# EAGLE board LN DRIVER (EAGLE 9.6.2)
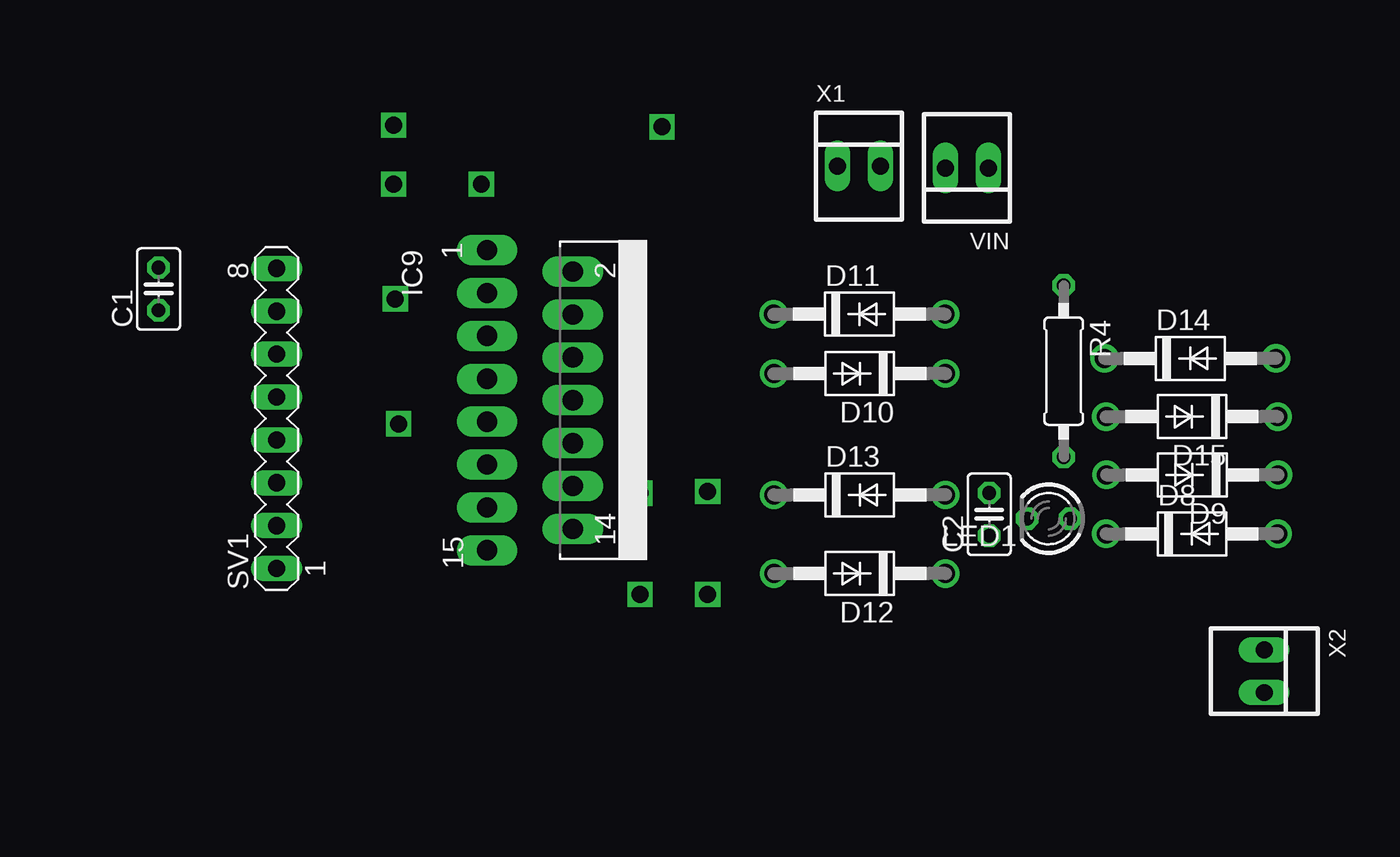
[diagram p0: board, top side]
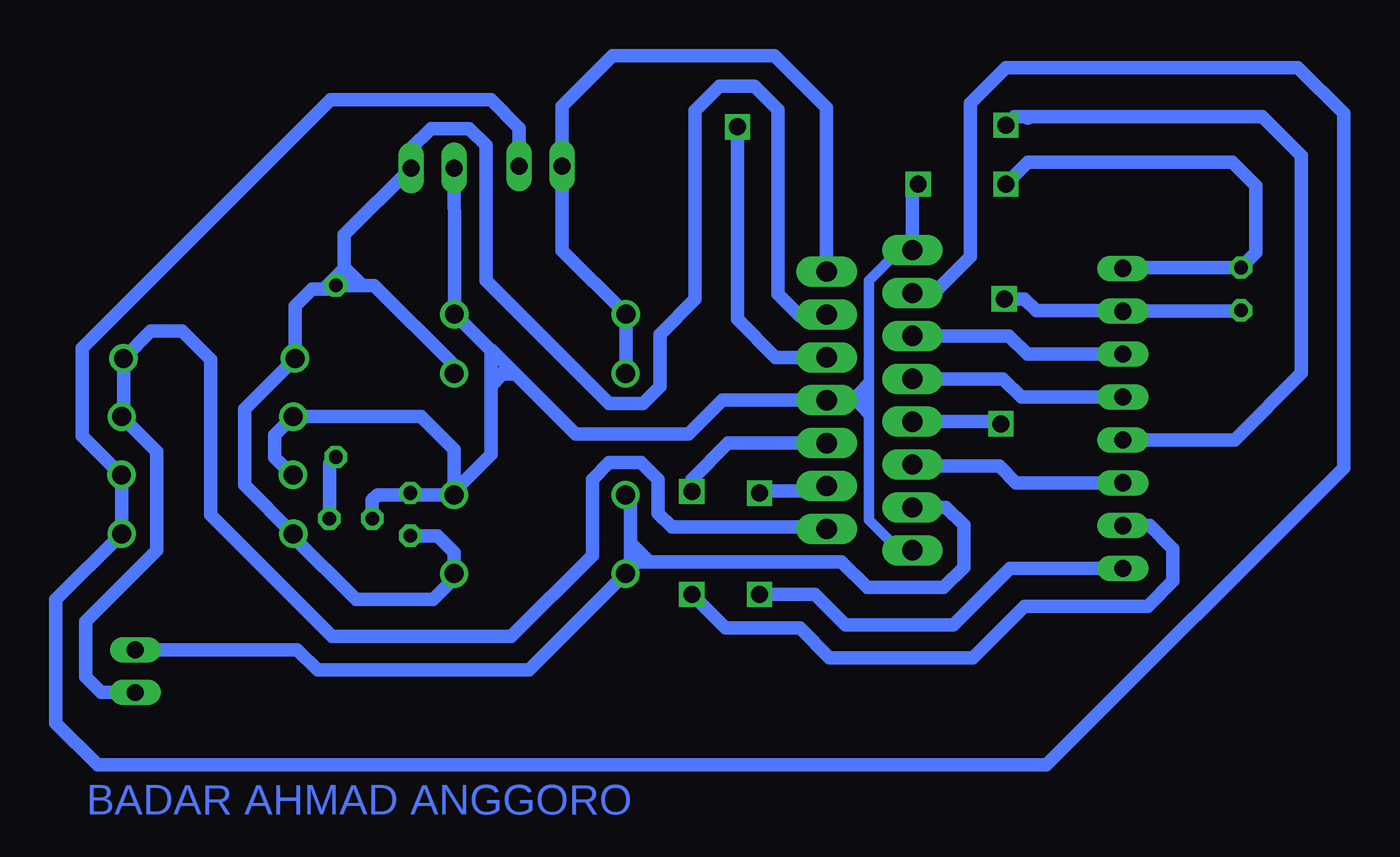
[diagram p1: board, bottom side, seen from below]

No outline drawn. Coordinates in mm, seen from the top.
Copper layers (1*16): Top 0.035mm / dielectric 1.5mm / Bottom 0.035mm
Design rules "default": minimum track width 6mil, minimum drill 0.35mm, track to track 6mil, track to pad 6mil, pad to pad 6mil, via to via 6mil, smd to smd 6mil, copper to edge 40mil, drill to drill 6mil, minimum pad ring 10mil, minimum via ring 8mil, stop-mask expansion 4mil, vias tented up to drill 0mil, thermal gap 10mil

## Footprints (pad centres in the part's own frame; a part is rotated, then mirrored left to right if it is on the bottom)
C025-025X050 = drill 0.813 octagon: 1 -1.27,0; 2 1.27,0
DO41-10 = drill 1.118: A 5.08,0; C -5.08,0
MULTIWATT-15 = drill 1.2 long: 1 -8.89,-7.62; 2 -7.62,-2.54; 3 -6.35,-7.62; 4 -5.08,-2.54; 5 -3.81,-7.62; 6 -2.54,-2.54; 7 -1.27,-7.62; 8 0,-2.54; 9 1.27,-7.62; 10 2.54,-2.54; 11 3.81,-7.62; 12 5.08,-2.54; 13 6.35,-7.62; 14 7.62,-2.54; 15 8.89,-7.62
LED3MM = drill 0.813 octagon: A -1.27,0; K 1.27,0
0207/10 = drill 0.813 octagon: 1 -5.08,0; 2 5.08,0
MA08-1 = drill 1.016 long: 1 -8.89,0; 2 -6.35,0; 3 -3.81,0; 4 -1.27,0; 5 1.27,0; 6 3.81,0; 7 6.35,0; 8 8.89,0
22-23-2021 = drill 1 long: 1 -1.27,0; 2 1.27,0

## Placement (x,y rotation side)
C1  100nF  [C025-025X050]  29.4,60.34 90 top
C2  100nF  [C025-025X050]  78.6,46.99 90 top
D8  1N4004  [DO41-10]  90.61,45.84 0 top
D9  1N4004  [DO41-10]  90.63,49.33 180 top
D10  1N4004  [DO41-10]  70.93,55.33 180 top
D11  1N4004  [DO41-10]  70.91,58.85 0 top
D12  1N4004  [DO41-10]  70.93,43.48 180 top
D13  1N4004  [DO41-10]  70.93,48.14 0 top
D14  1N4004  [DO41-10]  90.51,56.23 0 top
D15  1N4004  [DO41-10]  90.61,52.78 180 top
IC9  L298  [MULTIWATT-15]  56.48,53.75 270 top
LED1  [LED3MM]  82.12,46.74 180 top
R4  330  [0207/10]  83.01,55.47 270 top
SV1  [MA08-1]  36.39,52.67 90 top
VIN  22-23-2021  [22-23-2021]  77.28,67.51 180 top
X1  22-23-2021  [22-23-2021]  70.88,67.62 0 top
X2  22-23-2021  [22-23-2021]  94.89,37.7 270 top

## Library data of the parts
C1 C2 R4 = rcl
D8-D15 = diode
IC9 = st-microelectronics
LED1 = led
SV1 = con-lstb; OC_FARNELL: unknown; OC_NEWARK: unknown
VIN X1 X2 = con-molex; MF: MOLEX; MPN: 22-23-2021; OC_FARNELL: 1462926; OC_NEWARK: 25C3832

## Nets
GND: C2.2 D9.A D11.A D13.A D15.A IC9.1 IC9.8 IC9.15 LED1.K VIN.2
N$1: IC9.5 SV1.6
N$3: IC9.7 SV1.5
N$5: SV1.1
N$8: SV1.2
N$16: SV1.4
N$17: IC9.11 SV1.3
N$44: LED1.A R4.2
N$204: D8.A D9.C IC9.3 X1.2
N$205: D10.A D11.C IC9.2 X1.1
N$206: D12.A D13.C IC9.13 X2.1
N$207: D14.A D15.C IC9.14 X2.2
S$1: IC9.6
S$2: C1.2 SV1.8
S$3: IC9.9
S$4: IC9.10
S$5: IC9.12
VCC: C1.1 SV1.7
VDD: C2.1 D8.C D10.C D12.C D14.C IC9.4 R4.1 VIN.1

## Tracks (layer width: path | path; a pad name or v marks a point on that pad's centre or on a via)
GND  (via drill 1)
  Bottom 0.61: IC9.15 49.63,44.86 51.42,46.65 51.42,52.85 | 51.42,52.85 51.92,53.35 | 51.92,53.35 52.32,53.75 | IC9.1 49.63,62.64 51.42,60.85 51.42,54.85 | 51.42,54.85 51.42,54.15 | 51.42,54.15 51.42,53.85 | 51.42,53.85 51.42,52.85 | 51.42,54.85 52.12,54.15 | 52.12,54.15 52.42,53.85 51.42,53.85 | 52.32,53.75 52.02,53.75 52.12,53.65 | 52.32,53.75 IC9.8 | 51.42,54.15 52.12,54.15 | 51.92,53.35 51.42,53.85
  Bottom 0.813: LED1.K 80.85,47.84 80.55,48.14 D13.A | D13.A 76.01,50.84 77.95,52.78 D15.A 86.62,51.69 86.62,50.35 85.6,49.33 D9.A | VIN.2 75.99,62.61 D11.A 73.82,56.68 | 73.82,54.6 73.82,50.55 76.01,48.36 D13.A | 73.82,54.6 73.82,55.15 | 73.82,55.15 73.82,56.68 | 73.82,56.68 73.75,56.68 72.37,55.3 | 72.37,55.3 68.82,51.75 62.12,51.75 60.12,53.75 IC9.8 | 72.37,55.3 73.12,55.3 | 73.12,55.3 73.67,55.3 73.82,55.15 | 73.12,55.3 73.82,54.6 | C2.2 78.48,48.14 D13.A | IC9.15 | IC9.1 48.86,66.21 v48.52,66.55
N$1
  Bottom 0.813: SV1.6 42.05,56.48 43.13,57.56 IC9.5
N$3
  Bottom 0.813: SV1.5 42.41,53.94 43.49,55.02 IC9.7
N$5  (via drill 1)
  Bottom 0.813: SV1.1 43.09,43.78 46.42,40.45 52.82,40.45 54.62,42.25 v57.92,42.25
N$8  (via drill 1)
  Bottom 0.813: SV1.2 34.79,46.32 33.42,44.95 33.42,43.05 34.92,41.55 42.22,41.55 45.27,38.49 53.77,38.49 55.52,40.25 59.92,40.25 v61.92,42.25
N$16  (via drill 1)
  Bottom 0.813: SV1.4 29.77,51.4 25.82,55.35 25.82,68.25 28.12,70.55 41.91,70.55 | 42.01,70.45 41.91,70.55 | 41.91,70.55 42.82,70.55 v43.32,70.05
N$17
  Bottom 0.813: SV1.3 42.73,48.86 43.72,49.85 49.12,49.85 49.32,49.65 49.15,49.65 IC9.11
N$44
  Bottom 0.813: R4.2 83.39,50.01 LED1.A
N$204
  Bottom 0.813: X1.2 72.15,69.88 73.82,71.55 83.32,71.55 98.02,56.85 98.02,51.64 D9.C 95.69,49.31 D8.A 99.59,41.94 99.59,34.62 97.12,32.15 40.92,32.15 23.32,49.75 23.32,70.75 26.02,73.45 43.32,73.45 45.42,71.35 45.42,62.25 47.57,60.1 IC9.3
N$205
  Bottom 0.813: IC9.2 53.94,71.07 57.02,74.15 66.62,74.15 69.61,71.16 X1.1 69.61,62.63 D11.C 65.83,55.35 D10.A
N$206
  Bottom 0.813: D13.C 65.55,47.84 65.55,45.31 | 65.55,45.31 65.55,43.78 D12.A | X2.1 85.29,38.97 84.09,37.77 71.56,37.77 D12.A | IC9.13 46.87,47.4 45.82,46.35 45.82,43.85 47.02,42.65 51.52,42.65 53.05,44.18 64.42,44.18 | D12.A 65.15,44.18 64.42,44.18 | 64.42,44.18 65.55,45.31
N$207
  Bottom 0.813: IC9.14 54.04,46.23 63.1,46.23 63.92,47.05 63.92,49.05 64.92,50.05 66.82,50.05 67.82,49.05 67.82,44.55 72.62,39.75 83.22,39.75 90.42,46.95 90.42,56.15 92.12,57.85 93.97,57.85 D14.A 95.59,52.88 D15.C 93.62,50.71 93.62,44.85 97.82,40.65 97.82,37.35 96.9,36.43 X2.2
S$1  (via drill 1)
  Top 0.813: 59.12,70.05 v59.22,69.95
  Bottom 0.813: v59.22,69.95 59.22,58.55 56.96,56.29 IC9.6
S$2  (via drill 1)
  Bottom 0.813: v43.32,66.55 42.02,67.85 29.92,67.85 28.52,66.45 28.52,62.49 C1.2 36.34,61.61 SV1.8
S$3  (via drill 1)
  Top 0.813: v43.62,52.35 43.42,52.55
  Bottom 0.813: IC9.9 43.75,52.48 v43.62,52.35
S$4  (via drill 1)
  Bottom 0.813: v61.92,48.35 61.92,49.06 59.77,51.21 IC9.10
S$5  (via drill 1)
  Bottom 0.813: IC9.12 54.24,48.37 57.92,48.37 v57.92,48.25
VCC  (via drill 1)
  Bottom 0.813: C1.1 29.45,59.02 SV1.7 36.42,59.05 41.52,59.05 42.22,59.75 v43.42,59.75
VDD
  Bottom 0.813: D10.C 76.01,55.83 80.73,60.55 81.42,60.55 | R4.1 83.23,60.55 83.03,60.35 83.72,60.35 | 83.72,60.35 84.42,60.35 85.43,59.34 D14.C 88.42,53.24 88.42,48.73 D8.C 85.53,45.66 81.82,41.95 77.24,41.95 76.01,43.18 D12.C 76.01,44.74 76.99,45.72 C2.1 | R4.1 81.42,60.55 | R4.1 82.51,61.05 82.51,61.56 | 82.51,61.64 82.51,63.55 VIN.1 78.55,68.68 77.38,69.85 75.12,69.85 74.12,68.85 74.12,60.85 66.82,53.55 64.82,53.55 63.82,54.55 63.82,57.65 61.74,59.73 61.74,70.91 60.3,72.35 58.22,72.35 56.82,70.95 56.82,60.05 55.52,58.75 55.44,58.83 IC9.4 | 81.42,60.55 82.51,61.64 | 82.51,61.64 82.51,61.56 | 82.51,61.56 83.72,60.35

## Text on the board
Bottom: BADAR AHMAD ANGGORO